# Altium PCB PCB_Elec_stim.PcbDoc
Units mil, origin at the board's own origin, x right, y up, seen from the top; angles counter-clockwise.
Board outline 820 x 765 mil, 2 copper layers (Top Layer, Bottom Layer); 48 components, 39 nets, 155 pads, 2 vias.
Unrouted connection lines stored in the file: 37.
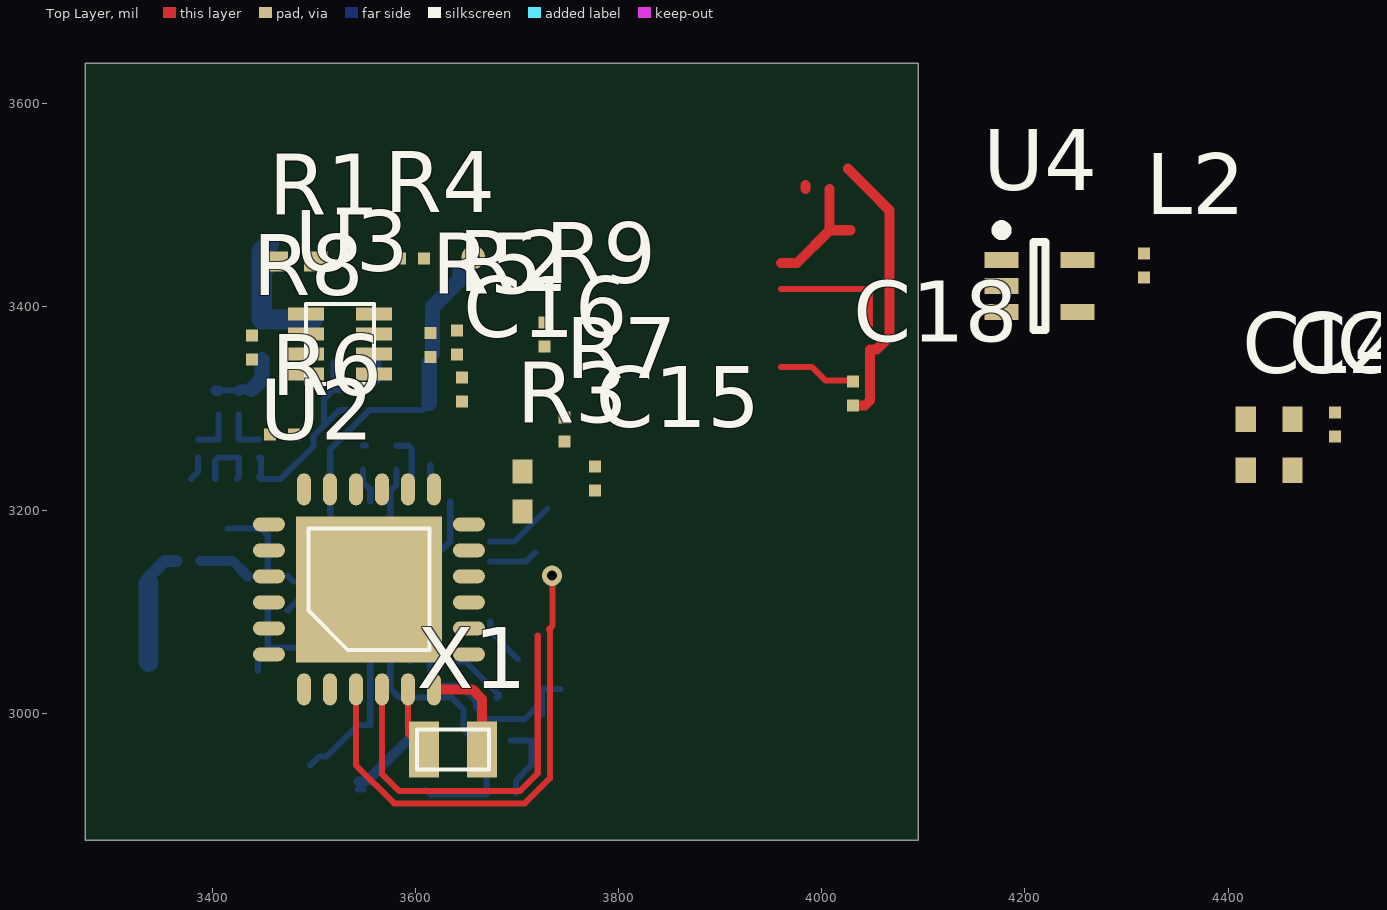
[diagram p0: Top Layer view]
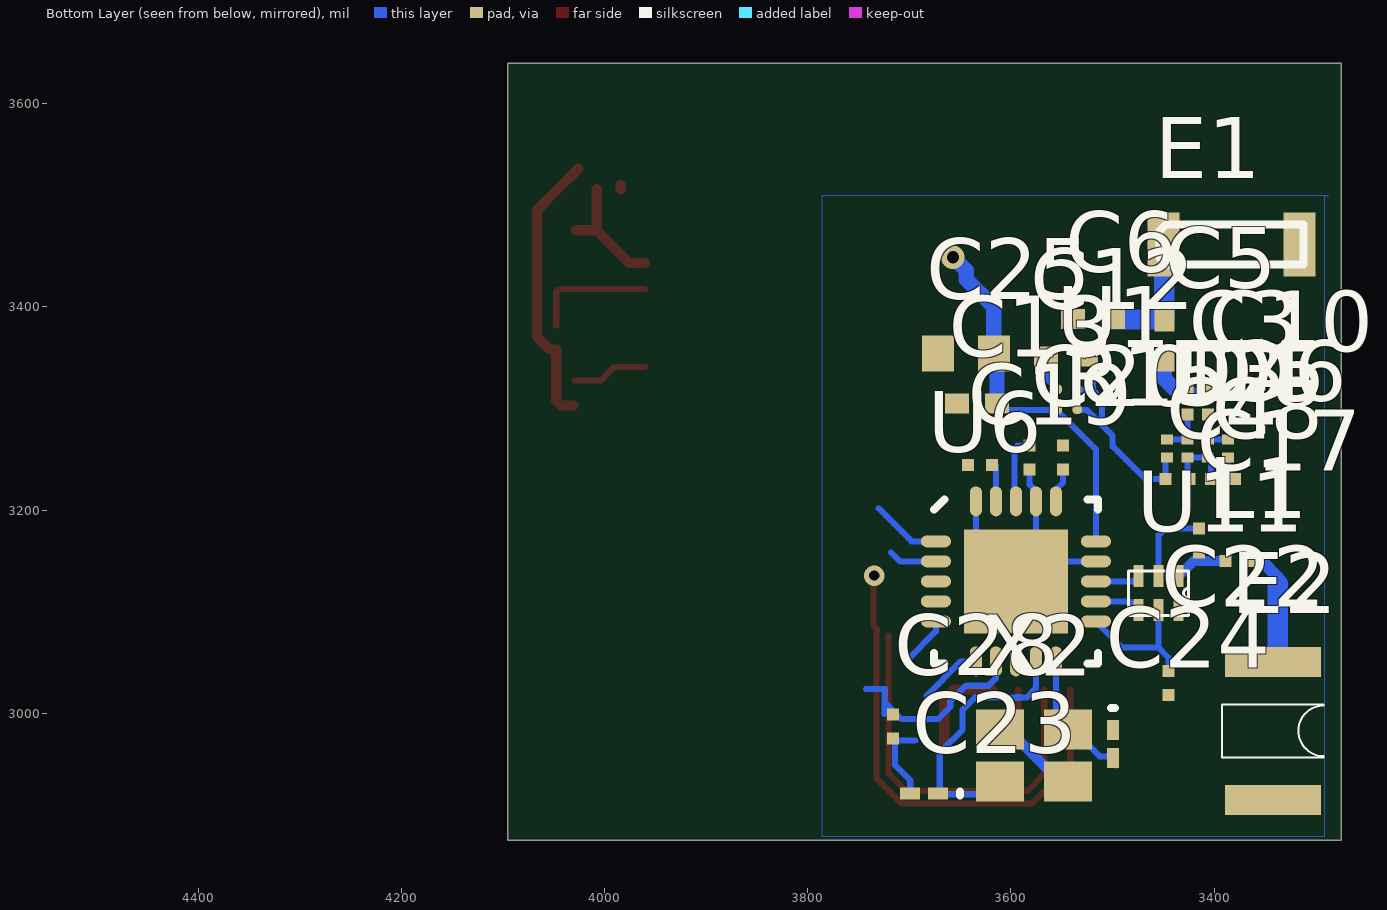
[diagram p1: Bottom Layer view, seen from below]

## Layer stack, top to bottom
Top Layer: signal copper 1.4
Dielectric: dielectric 12.6, FR-4, Dk 4.8
Bottom Layer: signal copper 1.4

## Board outline
3275,3640 4095,3640 4095,2890 4095,2875 3275,2875

## Design rules (kind name [scope] priority, off if disabled: settings)
Clearance [All] p1: gap=6
PolygonConnect [All] p1: connectstyle=Relief reliefconductorwidth=10 reliefentries=4 polygonreliefangle="90 Angle"
RoomDefinition Bipolar_HCP [InComponentClass('Bipolar_HCP')] p1: confinementstyle=ConfineIn formatcopy=TRUE lockcomponents=FALSE outline 4140,2935 5785,2935 5785,3135 4140,3135
RoomDefinition RF_Power_small_doubler [InComponentClass('RF_Power_small_doubler')] p2: confinementstyle=ConfineIn formatcopy=TRUE lockcomponents=FALSE outline 0,0 2000,0 2000,1000 0,1000
RoomDefinition Radio [InComponentClass('Radio')] p3: confinementstyle=ConfineIn formatcopy=TRUE lockcomponents=FALSE outline 4140,3210 6910,3210 6910,3520 4140,3520
RoomDefinition MCU_EM [InComponentClass('MCU_EM')] p4: confinementstyle=ConfineIn formatcopy=TRUE lockcomponents=FALSE outline 4140,2935 6245,2935 6245,3325 4140,3325
RoutingVias [All] p1: holewidth=28 width=50 viastyle="Through Hole" minholewidth=28 minwidth=50 maxholewidth=28 maxwidth=50
SilkscreenOverComponentPads [All] p1: minsilkscreentomaskgap=10
SolderMaskExpansion [All] p1: expansion=3
Width [All] p1: maxlimit=30 minlimit=6 preferedwidth=6
27 further rules are at their usual default settings.

## Classes and differential pairs
component class Bipolar_HCP: R1 R2 R3 R4 R5 R6 R7 R8 R9 U3
component class RF_Power_small_doubler: C3 C4 C5 C6 C8 C10 C12 C13 D3 D4 D5 D6 E1 U1
component class MCU_EM: C14 C15 C16 C18 C21 C26 U2 X1
component class Radio: C17 C19 C20 C22 C23 C24 C25 C28 E2 L1 L2 R15 U4 U6 U11 X2

## Components (designator, comment, footprint, x,y, rotation, side; value= is the part's Value field where it differs from the comment)
C3 "NP0 50V" 0201 3426.19,3305.81 r90 bottom
C4 "NP0 50V" 0201 3436.19,3230.81 r180 bottom
C5 "NP0 50V" 0402 3448.95,3367.96 r90 bottom
C6 "NP0 50V" 0402 3518.94,3388.21 r0 bottom
C8 "NP0 50V" 0201 3391.19,3230.81 r180 bottom
C10 "NP0 50V" 0201 3406.19,3305.81 r90 bottom
C12 "NP0 50V" CAPC1005L 3545.68,3351.17 r0 bottom
C13 "NP0 50V" CAPC1005L 3633.27,3305.17 r180 bottom
C14 "NP0 4V" 0402s 4417.35,3264.5 r90 top
C15 "NP0 50V" 0201 3776.6,3231.36 r270 top
C16 "NP0 50V" 0201 3645.79,3318.8 r90 top
C17 "NP0 50V" 0201 3415,3170 r270 bottom
C18 "NP0 10V" 0201 4030.6,3314.8 r270 top
C19 "NP0 50V" 0201 3630.33,3244.31 r180 bottom
C20 "NP0 50V" 0201 3581.57,3251.64 r270 bottom
C21 "NP0 10V" 0201 4505.25,3284.28 r90 top
C22 "NP0 50V" 0201 3445,3030 r270 bottom
C23 "NP0 50V" 0603 3685.31,2921.34 r0 bottom
C24 "NP0 50V" 0603 3499.45,2969.73 r270 bottom
C25 "NP0 50V" 1608[0603] 3644.38,3354.15 r0 bottom
C26 "NP0 10V" 0402s 4463.35,3264.5 r90 top
C28 "NP0 50V" 0201 3716.16,2987.08 r270 bottom
D3 "D Schottky" Diode0201 3446.19,3260.81 r270 bottom
D4 "D Schottky" Diode0201 3426.19,3260.81 r90 bottom
D5 "D Schottky" Diode0201 3406.19,3260.81 r270 bottom
D6 "D Schottky" Diode0201 3386.19,3260.81 r90 bottom
E1 "MicroAntenna" 2450AT18B100 3383,3461.67 r0 bottom
E2 "MicroAntenna" microantenna 3342.09,3050.74 r270 bottom
L1 "Inductor" 0201 3376.81,3150 r180 bottom
L2 "Inductor" 0201 4317.33,3440.89 r90 top
R1 "Res2" 0402 3482.68,3444.59 r180 top
R2 "Res2" 0201 3640.99,3365.1 r90 top
R3 "Res2" 0402 3705.36,3218.62 r270 top
R4 "Res2" 0201 3596.91,3447.96 r0 top
R5 "Res2" 0201 3614.71,3362.48 r270 top
R6 "Res2" 0201 3468.91,3274.58 r0 top
R7 "Res2" 0201 3747.03,3279.23 r90 top
R8 "Res2" 0201 3439.21,3360.29 r90 top
R9 "Res2" 0201 3727.04,3372.99 r90 top
R15 "Res2" 0201 3548.62,3251.86 r90 bottom
U1 "bhxxrb1wgut" BGA2x2_p5 3554.38,3319.06 r180 bottom
U2 "EFM32TG110" QFN24_EM 3490.35,3023.69 r90 top
U3 "MAX9618" MAX_X8CN_SC70_8 3559.31,3334 r180 top
U4 "tps61220" SOT353-5N 4214.37,3420.51 r0 top
U6 "QFN24 4x4 package" NORDIC_QFN20P400X400X90-25N 3595,3130 r180 bottom
U11 "balun" balun 3435,3135 r270 bottom
X1 "ABS06" ABS06 3637.09,2964.35 r0 top
X2 "TSX-3225, 16MHz, Cl=9pF, +/-10ppm" "bt-xtal 2.5 x 2 mm" 3610.89,2933.07 r180 bottom

## Footprints (in the part's own frame and the unit in brackets; to place one, negate y for a bottom-side part, rotate by r counter-clockwise, add the part's x,y. Pads: shape width x height; smd on the part's side, far side on the other; paste and mask are expansions set on the pad)
0201 [mm]
  rect 0.3x0.3 smd: 1(-0.3,0) 2(0.3,0)
  body extent -0.3,-0.15 0.3,0.15, height 0.3
0402 [mm] "Chip Capacitor, Body 1.0x0.5mm, IPC High Density"
  rect 0.6x0.5 smd: 1(-0.5,0) 2(0.5,0)
  body extent -0.55,-0.3 0.55,0.3, height 1.3
0402s [mil]
  rect 25x20 smd: 1(-25,0) 2(25,0)
0603 [mm] "Chip Inductor, Body 0.6x0.3mm, IPC High Density"
  rect 0.5x0.3 smd: 1(-0.35,0) 2(0.35,0)
  silkscreen extent -0.9,-0.05 -0.9,0.05, body extent -0.33,-0.18 0.33,0.18, height 0.55
1608[0603] [mm] "Chip Capacitor, Body 1.6x0.8mm, IPC High Density"
  rect 0.8x0.9 smd: 1(-0.7,0) 2(0.7,0)
  body extent -0.87,-0.48 0.87,0.48, height 1.3
2450AT18B100 [mm]
  rect 0.8x1.6 smd: 1(1.7,0) 2(-1.7,0)
  silkscreen extent -1.8,-0.5 1.8,0.5
ABS06 [mm]
  rect 0.75x1.4 smd: 1(-0.725,0) 2(0.725,0)
  silkscreen extent -0.9,-0.5 0.9,0.5
balun [mm]
  rect 0.55x0.25 smd: 1(0,0) 2(0,-0.5) 3(0,-1) 4(0.85,-1) 5(0.85,-0.5) 6(0.85,0)
  silkscreen extent -0.14,-1.25 0.99,0.25, body extent -0.14,-1.25 0.99,0.25, height 0.6
BGA2x2_p5 [mm]
  round 0.25 smd: A1(0,0) A2(0.5,0) B1(0,-0.5) B2(0.5,-0.5)
  body extent -0.25,-0.77 0.75,0.27, height 0.6
"bt-xtal 2.5 x 2 mm" [mm] "Mercury X32 series"
  rect 1.2x1 smd: 1(0,0) 2(1.7,0) 3(1.7,1.3) 4(0,1.3)
  body extent -0.4,-0.35 2.1,1.65, height 0.65
CAPC1005L [mm] "Chip Capacitor, Body 1.0x0.5mm, IPC High Density"
  rect 0.6x0.5 smd: 1(-0.5,0) 2(0.5,0)
  body extent -0.55,-0.3 0.55,0.3, height 0.6
Diode0201 [mm]
  rect 0.25x0.3 smd: 1(-0.225,0) 2(0.225,0)
MAX_X8CN_SC70_8 [mm]
  rect 0.9x0.33 smd: 1(0,0) 2(0,-0.5) 3(0,-1) 4(0,-1.5) 5(1.7,-1.5) 6(1.7,-1) 7(1.7,-0.5) 8(1.7,0)
  silkscreen extent 0,-1.75 1.7,0.25
microantenna [mm]
  rect 0.75x2.4 smd: 1(0,0) 2(3.45,0)
  silkscreen extent 1.06,-1.27 2.39,1.27, body extent -0.2,-1.05 3.6,1.05, height 0.6
NORDIC_QFN20P400X400X90-25N [mm] "QFN24 4x4x0.85mm, 0.5mm pitch - Medium Density"
  oval 0.75x0.3 smd: 1(-2,1) 2(-2,0.5) 3(-2,0) 4(-2,-0.5) 5(-2,-1) 11(2,-1) 12(2,-0.5) 13(2,0) 14(2,0.5) 15(2,1)
  oval 0.3x0.75 smd: 6(-1,-2) 7(-0.5,-2) 8(0,-2) 9(0.5,-2) 10(1,-2) 16(1,2) 17(0.5,2) 18(0,2) 19(-0.5,2) 20(-1,2)
  rect 2.6x2.6 smd: 21(0,0)
  silkscreen extent -2.05,-2.05 2.05,2.05, body extent -2.05,-2.05 2.05,2.05, height 0.9
QFN24_EM [mm]
  oval 0.8x0.35 smd: 1(0,0) 2(0,-0.65) 3(0,-1.3) 4(0,-1.95) 5(0,-2.6) 6(0,-3.25) 13(5,-3.25) 14(5,-2.6) 15(5,-1.95) 16(5,-1.3) 17(5,-0.65) 18(5,0)
  oval 0.35x0.8 smd: 7(0.875,-4.125) 8(1.525,-4.125) 9(2.175,-4.125) 10(2.825,-4.125) 11(3.475,-4.125) 12(4.125,-4.125) 19(4.125,0.875) 20(3.475,0.875) 21(2.825,0.875) 22(2.175,0.875) 23(1.525,0.875) 24(0.875,0.875)
  rect 3.65x3.65 smd: 25(2.5,-1.625)
  silkscreen extent 0.98,-3.14 4.02,-0.11
SOT353-5N [mm] "SOT353, 5-Leads, Body 2x1.3mm, Pitch 0.65mm, Lead Span 2.1mm, IPC Medium Density"
  rect 0.85x0.4 smd: 1(-0.95,0.65) 2(-0.95,0) 3(-0.95,-0.65) 4(0.95,-0.65) 5(0.95,0.65)
  silkscreen extent -1.07,-1.1 0.15,1.52, body extent -0.7,-1.1 0.7,1.1, height 1.1

## Part data
C3 C4 C5 C6 C8 C10 C12 C13 C14 C15 C16 C17 C18 C19 C20 C21 C22 C23 C24 C25 C26 C28: library part Cap, "Capacitor"
D3 D4 D5 D6: "Schottky Diode"
R1 R2 R3 R4 R5 R6 R7 R8 R9 R15: "Resistor"
U2: "EFM32TG110F32"
U6: library part "nRF24L01P - 4x4", "2.4GHz Tranceiver with embedded MCU and 10 bit ADC"
X2: library part BT-XTAL, "Crystal"

## Via types
v1: diameter 23, hole 12, Top Layer to Bottom Layer, 1 vias
v2: diameter 20, hole 10, Top Layer to Bottom Layer, 1 vias

## Nets (pads, with @x,y where several pads share a name; then routed paths per layer and width w, separated by ;. In a path a pad name is that pad's centre, name@x,y a point inside that pad or via, vN(x,y) a via of type N, cw(c..) or ccw(c..) an arc to the next point about the centre after c; other vN are vias at no path point)
CE: U6.1 | length 69.8
  Bottom Layer w6: U6.1 3697.64,3169.37 3730.1,3201.83
CS_NORDIC: U2.11 U6.2 | length 47.9
  Bottom Layer w6: U6.2 3709.35,3149.68 3718.07,3158.4
DAC0: R3.2 U2.8
DAC1: R6.2 U2.18
DBG_SWCLK: U2.19
DBG_SWDIO: U2.20
ELEC+: R1.1 R4.1
ELEC-: R7.1 U3.1
GND: C6.2 C8.2 C12.2 C13.1 C14.1 C15.1 C16.2 C17.1 C18.2 C19.1 C20.2 C21.2 C22.2 C23.2 C24.1 C25.2 C26.2 C28.2 D6.1 L2.1 R5.2 R15.2 U1.A1 U2.1 U2.25 U4.3 U6.8 U6.14 U6.17 U6.20 U6.21 U11.2 X2.2 X2.4 | length 965.1
  Top Layer w10: 3984.08,3516.16 3984.08,3519.91 ; 4025.89,3536.01 4046.23,3515.67 4066.57,3495.33 4066.57,3370.87 4053.76,3358.05 4047.52,3358.05 4047.52,3308 4042.51,3302.99 C18.2
  Bottom Layer w6: C8.2 3386.19,3237.62 D6.1 ; C17.1 3448.19,3181.81 3454.68,3175.32 U11.2 ; U6.14 U6.21@3575.32,3149.68 ; X2.2@3543.07,2925 X2.2@3548.69,2925 ; R15.2 R15.2@3551.54,3263.67 ; U1.A1 3563.55,3328.23 3563.55,3349.35 C12.2 ; C20.2 3581.57,3225.25 3575.32,3218.99 U6.17 U6.21@3575.32,3149.68 ; U6.8 U6.21 ; X2.4@3600.17,2966.35 X2.4@3610,2976.18 ; U6.20 3634.37,3169.37 U6.21 ; 3693.93,2973.37 3714.26,2973.37 3714.26,2949.24 3699.09,2934.07 C23.2 ; U6.21@3575.32,3149.68 U6.21
  Bottom Layer w10: X2.2 3552.03,2933.07 3603.21,2984.25 X2.4
IRQ: U6.6 | length 66.3
  Bottom Layer w6: U6.6 3649.14,3051.26 3682.85,3017.55 3680.3,3015 3680,3015
MISO: U2.4 U6.5 | length 434.8
  Top Layer w6: U2.4 3567.12,2940.5 3584.17,2923.46 3702.84,2923.46 3720.48,2941.1 3720.48,3076.61
  Bottom Layer w6: U6.5 3673.74,3080.73 3700.98,3053.49
MOSI: U2.3 U6.4 | length 493
  Top Layer w6: U2.3 3541.53,2949.12 3579.19,2911.46 3707.81,2911.46 3732.48,2936.13 3732.48,3081.58 3731.37,3082.69 3735.09,3086.41 3735.09,3135.03 v2(3734.55,3135.57)
NetC3_1: C3.1 D3.1 D4.2 | length 44.3
  Bottom Layer w6: C3.1 D4.2 D3.1
NetC3_2: C3.2 C5.1 C10.2 | length 69.4
  Bottom Layer w6: C10.2 C3.2
  Bottom Layer w10: C10.2@3403.45,3317.62 C10.2 ; C3.2 3427.35,3318.79 3438.53,3318.79
  Bottom Layer w15: 3438.53,3318.79 3448.95,3329.2 C5.1
NetC5_2: C5.2 C6.1 E1.1 | length 142.5
  Bottom Layer w20: E1.1@3451.26,3438.12 E1.1@3451.26,3453.25 ; E1.1@3455.71,3461.67 3448.95,3454.91 C5.2 3498.7,3387.64 C6.1
NetC10_1: C10.1 D5.1 D6.2 | length 44.3
  Bottom Layer w6: D6.2 D5.1 C10.1
NetC14_2: C14.2 U2.16
NetC15_2: C15.2 U2.5 X1.1 | length 187.7
  Top Layer w6: U2.5 3592.71,2980.18 X1.1 ; 3960.03,3417.75 4044.58,3417.75 4047.52,3414.81 4047.52,3381.68
NetC16_1: C16.1 U2.6 X1.2 | length 222.9
  Top Layer w10: U2.6 3655.89,3023.69 3665.63,3013.95 X1.2 ; 3960.03,3443.34 3975.66,3443.34 4007.91,3475.6 ; 4007.7,3516.16 4007.7,3475.81 4007.91,3475.6 ; 4028.01,3475.6 4007.91,3475.6
NetC17_2: C17.2 L1.1 U11.1 | length 52.6
  Bottom Layer w10: L1.1 3420,3150 U11.1
NetC19_2: C19.2 U6.19 | length 35.9
  Bottom Layer w6: U6.19 C19.2@3614.68,3244.68
NetC22_1: C22.1 U6.11 U11.5 | length 136.1
  Bottom Layer w6: C22.1 3445,3055 3454.68,3064.68 ; U11.5 3454.68,3064.68 ; U6.11 3490.31,3064.68 3454.68,3064.68
NetC23_1: C23.1 U6.9 X2.1 | length 262.5
  Bottom Layer w6: U6.9 3575.32,3024.68 3584.5,3015.5 3635.68,3015.5 3647.5,3003.68 3647.5,2984.09 3670,2961.59 3670,2920 3615,2920 X2.1@3610,2925
NetC24_2: C24.2 U6.10 X2.3 | length 138.1
  Bottom Layer w6: C24.2@3496.52,2948.99 3505.23,2957.7 3506.15,2957.7 3512.57,2957.71 3543.6,2988.74 3555.63,2988.74 U6.10
NetE2_1: E2.1 L1.2 | length 117.7
  Bottom Layer w12: 3337.3,3127.81 3337.3,3134.11 3353.19,3150 L1.2
  Bottom Layer w20: E2.1@3337.3,3050.74 3337.3,3127.81
NetL2_2: L2.2 U4.5
NetR1_2: R1.2 R3.1 U3.5
NetR2_2: R2.2 R5.1 U3.3
NetR4_2: R4.2 R8.1 R9.2 U3.7
NetR6_1: R6.1 R8.2 U3.6
NetR7_2: R7.2 R9.1 U3.2
NetR15_1: R15.1 U6.16 | length 34.2
  Bottom Layer w6: R15.1 3548.62,3227.26 3555.63,3220.25 U6.16
NetU6_12: U6.12 U11.4 | length 45.5
  Bottom Layer w6: U11.4 3483.15,3110.32 U6.12
NetU6_13: U6.13 U11.3 | length 44
  Bottom Layer w6: U11.3 3479.37,3130 U6.13
RESET: U2.7
SCLK: U2.10 U6.3
V3P0: C13.2 C18.1 C20.1 C21.1 C25.1 C26.1 C28.1 R2.1 U1.B1 U2.2 U2.9 U2.12 U2.15 U2.22 U3.8 U6.7 U6.15 U6.18 | length 701.4
  Top Layer w6: 3960.03,3340.98 3990.33,3340.98 4003.79,3327.51 C18.1@4029.7,3327.51
  Bottom Layer w6: U6.15 3516.26,3259.84 3555.17,3298.75 3607.16,3298.75 C13.2 ; C20.1 3593.36,3263.45 3596.48,3260.34 3596.48,3210.22 U6.18 ; U6.7 3614.68,3034.57 3621.76,3027.5 3643.92,3027.5 3659.5,3011.91 3659.5,3006.51 3671.51,2994.5 3707.68,2994.5 3724.54,3011.36 ; v1(3657.05,3448.99) v1@3659.31,3451.25 ; 3723.91,3023.99 3742.73,3023.99 ; 3724.54,2999.35 3724.54,3011.36 ; 3724.54,3023.36 3724.54,3011.36
  Bottom Layer w15: C13.2 C25.1@3613.58,3345.52 ; C25.1 3616.82,3400.15 3643.91,3427.24 3643.91,3435.85 v1(3657.05,3448.99)
VIRTUALGND: C4.2 C8.1 D4.1 D5.2 | length 64.4
  Bottom Layer w6: C8.1 3403,3248.77 D5.2 D4.1 3426.19,3232.62 C4.2
VRF: C4.1 C12.1 D3.2 U1.A2 U1.B2 | length 236
  Bottom Layer w6: C4.1@3446.19,3232.62 C4.1 ; D3.2 3448,3251.96 C4.1 ; 3510.16,3283.48 3510.16,3309.41 3519.34,3318.58 ; C12.1 3519.34,3344.51 3519.34,3318.58 ; U1.B2@3534.7,3298.75 3525.43,3298.75 3499.84,3273.16 3499.84,3262.97 3467.68,3230.81 C4.1 ; U1.A2@3534.7,3318.43 3519.49,3318.43 3519.34,3318.58
pads on no net: E1.2 E2.2 U2.13 U2.14 U2.17 U2.21 U2.23 U2.24 U3.4 U4.1 U4.2 U4.4 U11.6

## Polygon pours and split planes (outlines as drawn)
GND on Bottom Layer "Bottom-GND" (solid, shelved, pour order 3): 3786.2,3509.53 3786.2,2879.03 3290.92,2879.03 3290.92,3509.53 3287.88,3509.53

## Other copper
Bottom Layer:
  pour cut-out: 3277.71,3520.89 3281.15,3300.82 3355.2,3331.48 3385.84,3343.35 3433.02,3344.51 3432.63,3398.98 3529.32,3398.98 3529.9,3424.62 3569.82,3425.19 3569.82,3517.17
  pour cut-out: 3287.04,2872.5 3443.99,2872.59 3422.13,2909.78 3422.13,3029.91 3456.91,3029.91 3457.15,3083.8 3422.13,3084.71 3422.13,3165.08 3287.04,3165.08

## Silkscreen, mask and mechanical layers (free items; w line width, h text height)
Mechanical 1:
  lines w2: 3275,2890 3275,3640 4095,3640 4095,2890 3275,2890